# Altium PCB HK0J2071758B02-AM-FPC-A1.PcbDoc (part 2 of 2)
Units mm, origin at the board's own origin, x right, y up, seen from the top; angles counter-clockwise.
Board outline 42.12 x 32.69 mm, 10 copper layers (TopLayer, MidLayer1, MidLayer2, MidLayer3, MidLayer4, MidLayer5, MidLayer6, MidLayer7, MidLayer8, BottomLayer); 37 components, 50 nets, 198 pads, 150 vias.
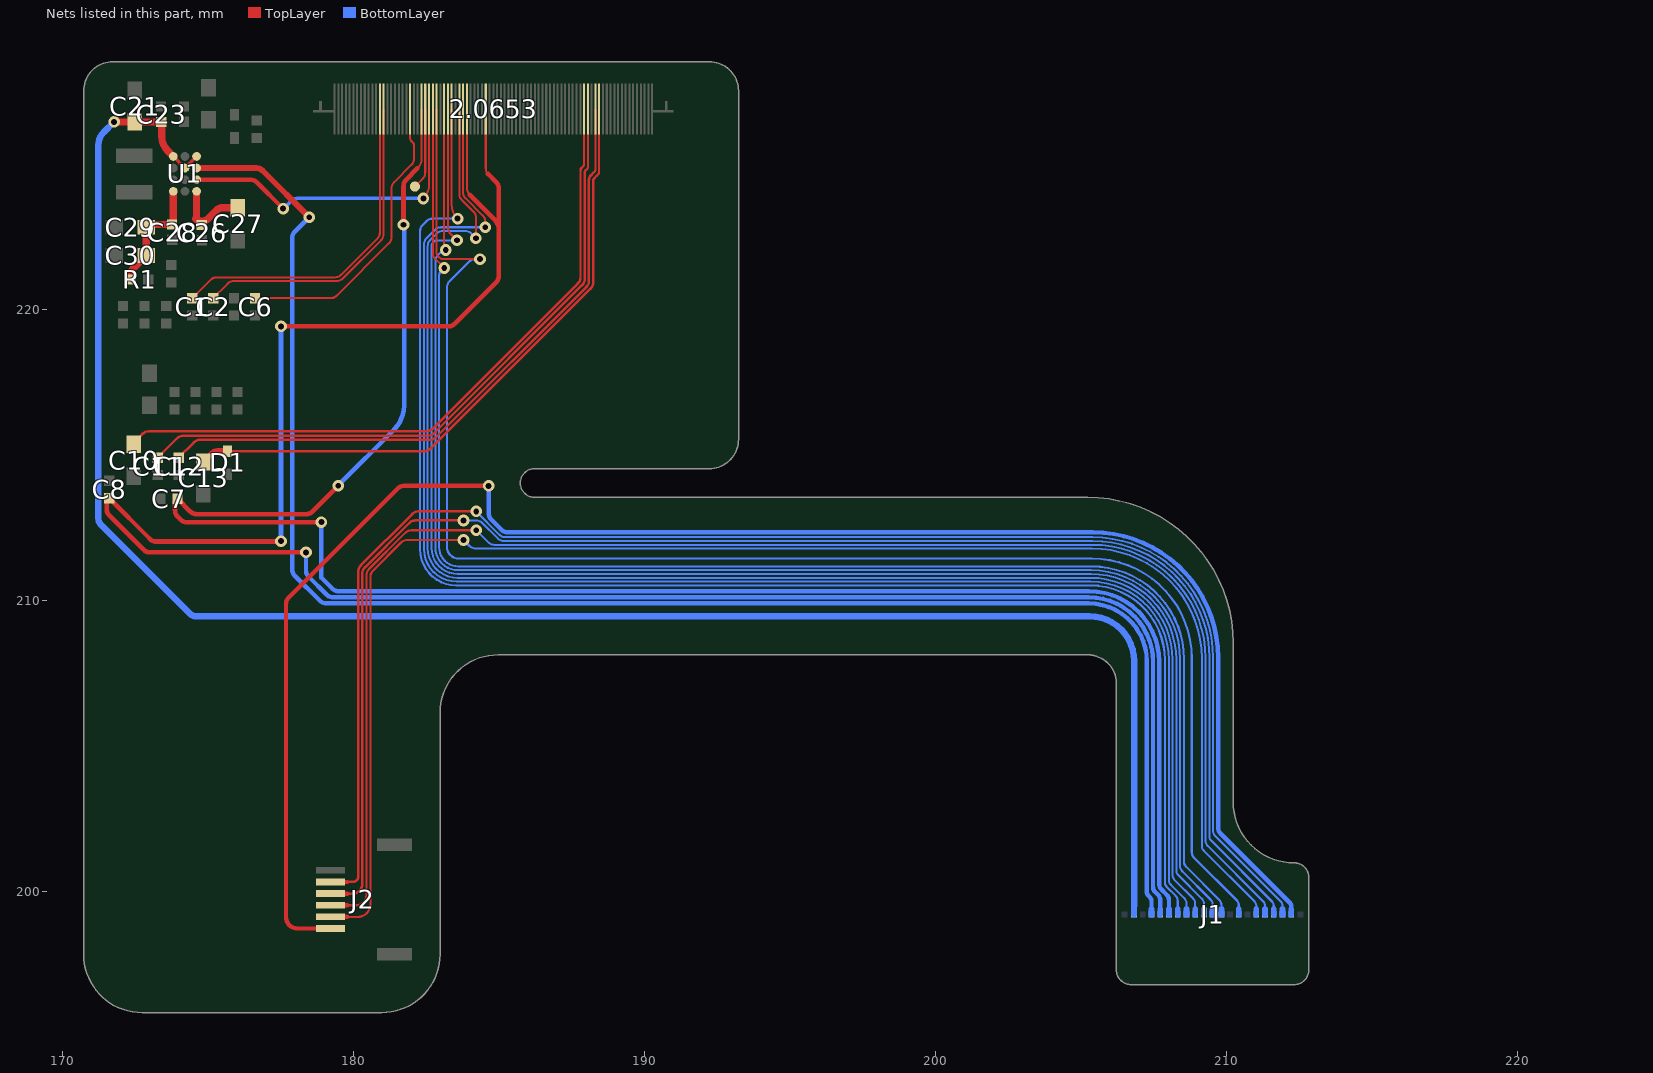
[diagram p2: the nets of this part, all layers, seen from the top]

## Via types
v1: diameter 0.4, hole 0.2, TopLayer to BottomLayer, 150 vias

## Nets (pads, with @x,y where several pads share a name; then routed paths per layer and width w, separated by ;. In a path a pad name is that pad's centre, name@x,y a point inside that pad or via, vN(x,y) a via of type N, cw(c..) or ccw(c..) an arc to the next point about the centre after c; other vN are vias at no path point) (continued)
NetC26_2: C26.2 C27.2 U1.D3 | length 2.7
  TopLayer w0.25: U1.D3@174.606,224.058 174.606,223.083 174.574,223.115 ccw(c174.786,223.327) 174.998,223.115 175.291,223.408 cw(c175.503,223.196) 175.503,223.496 C27.2@176.025,223.496
PVDD: C28.2 C29.1 C30.1 R1.2 U1.D1 | length 4.1
  TopLayer w0.25: R1.2@172.344,221.022 172.344,221.201 cw(c172.644,221.201) 172.432,221.413 C30.1@172.873,221.854 C29.1@172.873,222.821 172.97,222.918 C28.2@173.766,222.918 173.806,222.958 U1.D1@173.806,224.058
RESET: 2.0653.28 J1.8 | length 54.3
  TopLayer w0.07: 2.0653.28@182.857,226.886 182.857,221.934 ccw(c182.984,221.934) 182.894,221.844 182.947,221.791 ccw(c183.1,221.945) 183.1,221.728 v1(184.347,221.728)
  BottomLayer w0.075: v1@184.345,221.727 184.181,221.727 ccw(c184.181,221.447) 183.983,221.645 183.302,220.964 ccw(c183.514,220.752) 183.214,220.752 183.214,211.83 ccw(c183.61,211.83) 183.61,211.435 205.384,211.435 cw(c205.384,207.999) 208.82,207.999 208.82,201.329 ccw(c209.07,201.329) 208.893,201.153 210.37,199.676 cw(c210.211,199.517) 210.436,199.517 210.436,199.386
  BottomLayer w0.2: J1.8@210.436,199.193 210.436,199.386
SCL: 2.0653.32 J1.15 | length 53.1
  TopLayer w0.07: 2.0653.32@183.377,226.886 183.377,223.595 ccw(c184.03,223.595) 183.568,223.133 v1(183.58,223.121) ; v1@183.461,223.14 v1@183.58,223.021
  BottomLayer w0.075: v1(183.58,223.121) 182.721,223.121 ccw(c182.721,222.821) 182.509,223.033 182.377,222.901 ccw(c182.589,222.689) 182.289,222.689 182.289,211.752 ccw(c183.531,211.752) 183.531,210.51 205.339,210.51 cw(c205.339,207.953) 207.895,207.953 207.895,200.309 ccw(c208.145,200.309) 207.968,200.133 208.262,199.838 cw(c208.086,199.662) 208.336,199.662 208.336,199.386
  BottomLayer w0.2: J1.15@208.336,199.193 208.336,199.386
SIO0: 2.0653.30 J1.11 | length 52.2
  TopLayer w0.07: v1@183.117,222.071 2.0653.30@183.117,226.886
  BottomLayer w0.07: v1@183.118,222.077 182.9,221.859 ccw(c183.112,221.647) 182.812,221.647 182.812,211.817 ccw(c183.597,211.817) 183.597,211.032 205.352,211.032 cw(c205.352,207.967) 208.417,207.967 208.417,200.861 ccw(c208.667,200.861) 208.491,200.684 209.462,199.712 cw(c209.286,199.536) 209.536,199.536 209.536,199.386
  BottomLayer w0.2: J1.11@209.536,199.193 209.536,199.386
  other v1: 183.171,222.041
SIO1: 2.0653.31 J1.12 | length 52.9
  TopLayer w0.07: 2.0653.31@183.247,226.886 183.247,222.809 ccw(c183.547,222.809) 183.335,222.597 v1(183.557,222.374)
  BottomLayer w0.07: v1(183.557,222.374) 182.853,222.374 ccw(c182.853,222.269) 182.778,222.343 182.735,222.3 ccw(c182.862,222.173) 182.682,222.173 182.682,211.795 ccw(c183.575,211.795) 183.575,210.902 205.347,210.902 cw(c205.347,207.962) 208.287,207.962 208.287,200.722 ccw(c208.537,200.722) 208.361,200.545 209.162,199.743 cw(c208.986,199.566) 209.236,199.566 209.236,199.386
  BottomLayer w0.2: J1.12@209.236,199.193 209.236,199.386
SIO2: 2.0653.34 J1.13 | length 53.9
  TopLayer w0.07: 2.0653.34@183.637,226.886 183.637,223.972 ccw(c183.937,223.972) 183.725,223.76 184.121,223.364 cw(c183.909,223.151) 184.209,223.151 v1(184.209,222.447)
  BottomLayer w0.07: v1(184.209,222.447) 184.052,222.604 ccw(c183.839,222.392) 183.839,222.692 183.067,222.692 ccw(c183.067,222.392) 182.855,222.604 182.64,222.389 ccw(c182.852,222.177) 182.552,222.177 182.552,211.794 ccw(c183.574,211.794) 183.574,210.772 205.343,210.772 cw(c205.343,207.957) 208.157,207.957 208.157,200.554 ccw(c208.407,200.554) 208.231,200.377 208.862,199.745 cw(c208.686,199.569) 208.936,199.569 208.936,199.386
  BottomLayer w0.2: J1.13@208.936,199.193 208.936,199.386
SIO3: 2.0653.35 J1.14 | length 54
  TopLayer w0.07: 2.0653.35@183.767,226.886 183.767,224.026 ccw(c184.067,224.026) 183.855,223.814 184.444,223.225 cw(c184.232,223.013) 184.532,223.013 v1(184.532,222.822)
  BottomLayer w0.07: v1(184.532,222.822) 183.014,222.822 ccw(c183.014,222.522) 182.802,222.734 182.51,222.443 ccw(c182.722,222.231) 182.422,222.231 182.422,211.765 ccw(c183.545,211.765) 183.545,210.642 205.34,210.642 cw(c205.34,207.955) 208.027,207.955 208.027,200.396 ccw(c208.277,200.396) 208.101,200.219 208.562,199.758 cw(c208.386,199.581) 208.636,199.581 208.636,199.386
  BottomLayer w0.2: J1.14@208.636,199.193 208.636,199.386
SWIRE: 2.0653.26 U1.C3 | length 11.5
  TopLayer w0.07: v1(182.402,223.811) ccw(c181.93,224.283) 182.597,224.283 2.0653.26@182.597,226.886
  TopLayer w0.15: U1.C3@174.606,224.458 176.461,224.458 cw(c176.461,224.158) 176.673,224.37 v1(177.579,223.464)
  BottomLayer w0.12: v1@177.583,223.446 177.861,223.723 cw(c178.073,223.511) 178.073,223.811 v1(182.402,223.811)
TE: 2.0653.27 J1.10 | length 52.3
  TopLayer w0.07: 2.0653.27@182.727,226.886 182.727,221.929 ccw(c182.977,221.929) 182.8,221.752 v1@183.111,221.441
  BottomLayer w0.075: v1@183.086,221.392 183.003,221.309 ccw(c183.144,221.168) 182.944,221.168 182.944,211.822 ccw(c183.601,211.822) 183.601,211.165 205.361,211.165 cw(c205.361,207.976) 208.55,207.976 208.55,201.017 ccw(c208.8,201.017) 208.623,200.84 209.765,199.698 cw(c209.594,199.527) 209.836,199.527 209.836,199.386
  BottomLayer w0.2: J1.10@209.836,199.193 209.836,199.386
  other v1: 183.119,221.423
TE1: 2.0653.25 pad.3 | length 2.8
  TopLayer w0.07: pad.3@182.11,224.222 182.38,224.493 ; 182.381,224.494 ccw(c182.172,224.702) 182.467,224.702 2.0653.25@182.467,226.886
TP-INT: J1.3 J2.2 | length 54.4
  TopLayer w0.085: 179.787,200.316 179.98,200.316 ccw(c179.98,200.496) 180.16,200.496 180.16,210.977 cw(c180.46,210.977) 180.248,211.189 182.025,212.967 cw(c182.237,212.755) 182.237,213.055 v1(184.219,213.055)
  TopLayer w0.15: J2.2@179.211,200.316 179.787,200.316
  BottomLayer w0.07: v1(184.219,213.055) 184.219,213.051 185.014,212.255 ccw(c185.226,212.467) 185.226,212.167 205.412,212.167 cw(c205.412,208.026) 209.552,208.026 209.552,202.072 ccw(c209.802,202.072) 209.626,201.895 211.877,199.644 cw(c211.736,199.502) 211.936,199.502 211.936,199.386
  BottomLayer w0.2: J1.3@211.936,199.193 211.936,199.386
TP-RST: J1.6 J2.5 | length 53.9
  TopLayer w0.075: 179.787,199.116 180.15,199.116 ccw(c180.15,199.546) 180.58,199.546 180.58,210.803 cw(c180.88,210.803) 180.668,211.015 181.635,211.982 cw(c181.847,211.77) 181.847,212.07 v1(183.783,212.07)
  TopLayer w0.15: J2.5@179.211,199.116 179.787,199.116
  BottomLayer w0.07: v1(183.783,212.07) 183.988,211.865 ccw(c184.2,212.077) 184.2,211.777 205.39,211.777 cw(c205.39,208.004) 209.162,208.004 209.162,201.562 ccw(c209.412,201.562) 209.236,201.385 210.977,199.644 cw(c210.836,199.502) 211.036,199.502 211.036,199.386
  BottomLayer w0.2: J1.6@211.036,199.193 211.036,199.386
TP-SCL: J1.5 J2.4 | length 54
  TopLayer w0.075: 179.787,199.516 180.099,199.516 ccw(c180.099,199.861) 180.445,199.861 180.445,210.859 cw(c180.745,210.859) 180.533,211.071 181.777,212.316 cw(c181.989,212.103) 181.989,212.403 v1(184.219,212.403)
  TopLayer w0.15: J2.4@179.211,199.516 179.787,199.516
  BottomLayer w0.07: v1(184.219,212.403) 184.627,211.995 ccw(c184.839,212.207) 184.839,211.907 205.396,211.907 cw(c205.396,208.01) 209.292,208.01 209.292,201.732 ccw(c209.542,201.732) 209.366,201.555 211.277,199.644 cw(c211.136,199.502) 211.336,199.502 211.336,199.386
  BottomLayer w0.2: J1.5@211.336,199.193 211.336,199.386
TP-SDA: J1.4 J2.3 | length 54.2
  TopLayer w0.085: 179.787,199.916 179.967,199.916 ccw(c179.967,200.253) 180.305,200.253 180.305,210.917 cw(c180.605,210.917) 180.393,211.129 181.918,212.654 cw(c182.13,212.442) 182.13,212.742 v1(183.783,212.742)
  TopLayer w0.15: J2.3@179.211,199.916 179.787,199.916
  BottomLayer w0.07: v1(183.783,212.742) 184.219,212.742 cw(c184.219,212.442) 184.431,212.654 184.96,212.125 ccw(c185.173,212.337) 185.173,212.037 205.409,212.037 cw(c205.409,208.023) 209.422,208.023 209.422,201.902 ccw(c209.672,201.902) 209.496,201.725 211.577,199.644 cw(c211.436,199.502) 211.636,199.502 211.636,199.386
  BottomLayer w0.2: J1.4@211.636,199.193 211.636,199.386
TP-VDD: J1.2 J2.6 | length 59.9
  TopLayer w0.15: J2.6@179.211,198.716 178.074,198.716 cw(c178.074,199.11) 177.68,199.11 177.68,209.876 cw(c177.98,209.876) 177.767,210.088 181.523,213.843 cw(c181.735,213.631) 181.735,213.931 v1(184.646,213.931)
  BottomLayer w0.15: v1(184.646,213.931) 184.646,212.988 ccw(c184.946,212.988) 184.734,212.776 185.085,212.425 ccw(c185.297,212.637) 185.297,212.337 205.417,212.337 cw(c205.417,208.032) 209.722,208.032 209.722,202.168 ccw(c209.972,202.168) 209.796,201.991 212.187,199.6 cw(c212.07,199.483) 212.236,199.483 212.236,199.386
  BottomLayer w0.2: J1.2@212.236,199.193 212.236,199.386
VBAT: C21.1 C23.1 J1.20 U1.A1 U1.A3 U1.B2 | length 64.6
  TopLayer w0.12: U1.A1@173.806,225.258 U1.B2@174.206,224.858 U1.A3@174.606,225.258
  TopLayer w0.25: v1(171.77,226.444) C23.1@173.391,226.444 ; C23.1@173.404,226.478 173.404,225.957 ccw(c174.124,225.957) 173.615,225.448 U1.A1@173.806,225.258
  BottomLayer w0.2: J1.20@206.836,199.193 206.836,199.49
  BottomLayer w0.22: 171.407,226.081 ccw(c171.838,225.651) 171.229,225.651 171.229,212.812 ccw(c171.529,212.812) 171.317,212.599 174.378,209.538 ccw(c174.591,209.75) 174.591,209.45 205.299,209.45 cw(c205.299,207.914) 206.836,207.914 206.836,199.49 ; 171.408,226.081 v1(171.77,226.444)
VCI: 2.0653.24 C7.1 J1.16 | length 67
  TopLayer w0.07: 182.197,224.845 ccw(c181.861,225.181) 182.337,225.181 2.0653.24@182.337,226.886
  TopLayer w0.16: v1@178.895,212.683 174.263,212.683 cw(c174.263,212.961) 174.067,212.764 173.951,212.879 cw(c174.163,213.092) 173.863,213.092 173.863,213.395 C7.1@173.954,213.486 174.392,213.049 ccw(c174.604,213.261) 174.604,212.961 178.377,212.961 ccw(c178.377,213.261) 178.589,213.049 v1(179.476,213.935) ; v1(181.718,222.906) 181.718,224.234 cw(c182.035,224.234) 181.811,224.458 182.197,224.845
  BottomLayer w0.15: v1(178.897,212.685) 178.897,210.776 179.274,210.399 ccw(c179.486,210.611) 179.486,210.311 205.283,210.311 cw(c205.283,207.897) 207.696,207.897 207.696,200.238 ccw(c207.946,200.238) 207.769,200.061 207.962,199.868 cw(c207.786,199.692) 208.036,199.692 208.036,199.386
  BottomLayer w0.16: v1@179.483,213.952 181.393,215.862 ccw(c180.556,216.699) 181.739,216.699 v1@181.739,223.016
  BottomLayer w0.2: J1.16@208.036,199.193 208.036,199.386
VCI_EN: J1.18 U1.B3 | length 56.7
  TopLayer w0.2: U1.B3@174.606,224.858 176.661,224.858 cw(c176.661,224.558) 176.873,224.77 v1(178.477,223.166)
  BottomLayer w0.15: v1(178.477,223.166) 177.983,222.671 ccw(c178.195,222.459) 177.895,222.459 177.895,211.058 ccw(c178.195,211.058) 177.983,210.846 178.85,209.979 ccw(c179.062,210.191) 179.062,209.891 205.276,209.891 cw(c205.276,207.891) 207.276,207.891 207.276,199.951 ccw(c207.41,199.951) 207.316,199.856 207.371,199.801 cw(c207.216,199.645) 207.436,199.645 207.436,199.386
  BottomLayer w0.2: J1.18@207.436,199.193 207.436,199.386
VDDI: 2.0653.36 2.0653.41 C8.1 J1.17 | length 80.8
  TopLayer w0.07: 2.0653.36@183.897,226.886 183.897,224.172 ccw(c184.234,224.172) 183.995,223.933 ; 2.0653.41@184.547,226.886 184.547,224.844 ccw(c184.818,224.844) 184.626,224.653
  TopLayer w0.16: v1@177.508,212.018 173.218,212.018 cw(c173.218,212.318) 173.005,212.106 C8.1@171.603,213.508 171.513,213.418 171.513,213.136 ccw(c171.813,213.136) 171.601,212.924 172.793,211.732 ccw(c173.005,211.944) 173.005,211.644 v1@178.374,211.644 ; v1(177.508,219.416) 183.265,219.416 ccw(c183.265,219.716) 183.477,219.503 184.907,220.934 ccw(c184.695,221.146) 184.995,221.146 184.995,222.732 ; 183.995,223.933 184.853,223.076 cw(c184.509,222.732) 184.995,222.732 ; 184.626,224.652 184.907,224.371 cw(c184.695,224.159) 184.995,224.159 184.995,222.732
  BottomLayer w0.15: v1(178.366,211.646) 178.366,211.028 ccw(c178.666,211.028) 178.454,210.816 179.082,210.189 ccw(c179.294,210.401) 179.294,210.101 205.276,210.101 cw(c205.276,207.891) 207.486,207.891 207.486,200.148 ccw(c207.735,200.148) 207.559,199.972 207.662,199.868 cw(c207.486,199.692) 207.736,199.692 207.736,199.386
  BottomLayer w0.16: v1(177.508,212.032) v1(177.508,219.416)
  BottomLayer w0.2: J1.17@207.736,199.193 207.736,199.386
VGH: 2.0653.67 C10.1 | length 23.5
  TopLayer w0.07: 187.889,224.915 187.911,224.937 ccw(c187.874,224.974) 187.927,224.974 2.0653.67@187.927,226.886
  TopLayer w0.085: C10.1@172.478,215.449 172.746,215.717 cw(c172.958,215.505) 172.958,215.805 182.504,215.805 ccw(c182.504,216.105) 182.716,215.892 187.716,220.892 ccw(c187.504,221.105) 187.804,221.105 187.804,224.768 cw(c187.947,224.768) 187.846,224.869 187.905,224.928
VGHO: 2.0653.68 C11.1 | length 23.1
  TopLayer w0.07: 188.01,224.805 188.038,224.832 ccw(c187.991,224.879) 188.057,224.879 2.0653.68@188.057,226.886
  TopLayer w0.085: C11.1@173.271,214.901 173.941,215.572 cw(c174.153,215.36) 174.153,215.66 182.564,215.66 ccw(c182.564,215.96) 182.776,215.747 187.861,220.832 ccw(c187.649,221.045) 187.949,221.045 187.949,224.708 cw(c188.036,224.708) 187.975,224.769 188.01,224.805
VGL: 2.0653.71 C13.1 D1.1 | length 22
  TopLayer w0.07: 188.367,224.598 188.414,224.645 ccw(c188.335,224.724) 188.447,224.724 2.0653.71@188.447,226.886
  TopLayer w0.085: D1.1@175.672,215.126 182.441,215.126 ccw(c182.441,215.426) 182.653,215.214 188.151,220.712 ccw(c187.939,220.924) 188.239,220.924 188.239,224.395 cw(c188.421,224.395) 188.292,224.523 188.367,224.598
  TopLayer w0.2: C13.1@174.834,214.753 175.12,215.038 cw(c175.332,214.826) 175.332,215.126 D1.1@175.672,215.126
VGLO: 2.0653.70 C12.1 | length 22.6
  TopLayer w0.07: 188.251,224.7 188.289,224.739 ccw(c188.223,224.805) 188.317,224.805 2.0653.70@188.317,226.886
  TopLayer w0.085: C12.1@173.991,214.901 174.516,215.427 cw(c174.728,215.215) 174.728,215.515 182.624,215.515 ccw(c182.624,215.815) 182.836,215.602 188.006,220.772 ccw(c187.794,220.984) 188.094,220.984 188.094,224.452 cw(c188.316,224.452) 188.159,224.608 188.251,224.7
VREF: 2.0653.21 C6.1 | length 10.3
  TopLayer w0.07: C6.1@176.616,220.384 179.212,220.384 ccw(c179.212,220.684) 179.424,220.472 181.219,222.267 ccw(c181.007,222.479) 181.307,222.479 181.307,224.158 cw(c181.607,224.158) 181.394,224.37 181.992,224.967 ccw(c181.779,225.179) 182.079,225.179 182.079,225.648 ccw(c181.969,225.648) 182.047,225.725 182.002,225.771 cw(c182.134,225.904) 181.947,225.904 2.0653.21@181.947,226.886
VREFN: 2.0653.14 C2.1 | length 11.2
  TopLayer w0.07: C2.1@175.131,220.342 175.673,220.884 cw(c175.886,220.672) 175.886,220.972 179.418,220.972 ccw(c179.418,221.272) 179.63,221.06 180.949,222.378 ccw(c180.737,222.59) 181.037,222.59 2.0653.14@181.037,226.886
VREFP: 2.0653.13 C1.1 | length 11.7
  TopLayer w0.07: C1.1@174.456,220.384 175.086,221.014 cw(c175.298,220.802) 175.298,221.102 179.364,221.102 ccw(c179.364,221.402) 179.576,221.19 180.819,222.432 ccw(c180.607,222.644) 180.907,222.644 2.0653.13@180.907,226.886
pads on no net: 2.0653.1 2.0653.2 2.0653.3 2.0653.8 2.0653.15 2.0653.17 2.0653.20 2.0653.22 2.0653.23 2.0653.29 2.0653.40 2.0653.66 2.0653.69 2.0653.78 2.0653.83 2.0653.84 2.0653.85

## Polygon pours and split planes (outlines as drawn)
GND on TopLayer "1" (solid, remove dead copper, pour order 12): 206.451,202.986 213.366,202.986 213.366,196.77 204.777,196.77
GND on TopLayer " " (hatched 45Degree grid 0.35 track 0.1, remove dead copper, pour order 30): 164.794,226.972 170.481,232.659 cw(c172.277,230.863) 172.277,233.403 199.434,233.403 217.193,215.643 cw(c215.397,213.847) 217.937,213.847 217.937,195.607 172.237,195.607 ccw(c172.237,193.067) 170.441,194.863 168.463,192.885
GND on TopLayer " " (solid, remove dead copper, pour order 34): 158.603,226.326 162.811,230.534 cw(c164.607,228.738) 164.607,231.278 226.783,231.278 226.783,195.611 cw(c224.243,195.611) 226.039,193.815 219.528,187.305 cw(c217.732,189.101) 217.732,186.561 153.88,186.561
GND on BottomLayer " " (hatched 45Degree grid 0.35 track 0.1, remove dead copper, pour order 28): 163.76,223.892 169.767,229.899 cw(c171.563,228.103) 171.563,230.643 213.621,230.643 217.12,227.144 cw(c215.324,225.348) 217.864,225.348 217.864,199.637 202.251,199.637 cw(c202.251,199.842) 202.106,199.697 191.281,199.697 ccw(c191.281,197.157) 189.485,198.953 183.984,193.453 cw(c182.188,195.249) 182.188,192.709 170.759,192.709
GND on BottomLayer " " (solid, remove dead copper, pour order 36): 185.726,214.005 185.726,193.411 cw(c185.564,193.411) 185.678,193.296 185.102,193.873 ccw(c183.306,192.077) 183.306,194.617 159.878,194.617 165.94,200.678 ccw(c164.144,202.474) 166.684,202.474 166.684,233.825 201.284,233.825 ccw(c201.284,236.365) 203.08,234.569 201.658,233.147 ccw(c203.454,231.35) 200.914,231.35 200.914,214.932

## Keep-outs
KeepOutLayer:
  lines w0.013: 170.73,197.83 ccw(c172.73,197.83) 172.73,195.83 ; 170.73,197.83 ccw(c172.73,197.83) 172.73,195.83 ; 170.73,197.83 ccw(c172.73,197.83) 172.73,195.83 ; 170.73,197.83 ccw(c172.73,197.83) 172.73,195.83 ; 170.73,197.83 170.73,227.509 ; 170.73,197.83 170.73,227.509 ; 170.73,197.83 170.73,227.509 ; 170.73,197.83 170.73,227.509 ; 170.73,227.509 cw(c171.73,227.509) 171.73,228.509 ; 170.73,227.509 cw(c171.73,227.509) 171.73,228.509 ; 170.73,227.509 cw(c171.73,227.509) 171.73,228.509 ; 170.73,227.509 cw(c171.73,227.509) 171.73,228.509 ; 171.73,228.509 192.23,228.509 ; 171.73,228.509 192.23,228.509 ; 171.73,228.509 192.23,228.509 ; 171.73,228.509 192.23,228.509 ; 172.73,195.83 180.97,195.83 ; 172.73,195.83 180.97,195.83 ; 172.73,195.83 180.97,195.83 ; 172.73,195.83 180.97,195.83 ; 180.97,195.83 ccw(c180.97,197.83) 182.97,197.83 ; 180.97,195.83 ccw(c180.97,197.83) 182.97,197.83 ; 180.97,195.83 ccw(c180.97,197.83) 182.97,197.83 ; 180.97,195.83 ccw(c180.97,197.83) 182.97,197.83 ; 182.97,197.83 182.97,206.13 ; 182.97,197.83 182.97,206.13 ; 182.97,197.83 182.97,206.13 ; 182.97,197.83 182.97,206.13 ; 182.97,206.13 cw(c184.97,206.13) 184.97,208.13 ; 182.97,206.13 cw(c184.97,206.13) 184.97,208.13 ; 182.97,206.13 cw(c184.97,206.13) 184.97,208.13 ; 182.97,206.13 cw(c184.97,206.13) 184.97,208.13 ; 184.97,208.13 205.235,208.13 ; 184.97,208.13 205.235,208.13 ; 184.97,208.13 205.235,208.13 ; 184.97,208.13 205.235,208.13 ; 186.23,213.53 cw(c186.23,214.03) 186.23,214.53 ; 186.23,213.53 cw(c186.23,214.03) 186.23,214.53 ; 186.23,213.53 cw(c186.23,214.03) 186.23,214.53 ; 186.23,213.53 cw(c186.23,214.03) 186.23,214.53 ; 186.23,213.53 205.235,213.53 ; 186.23,213.53 205.235,213.53 ; 186.23,213.53 205.235,213.53 ; 186.23,213.53 205.235,213.53 ; 186.23,214.53 192.23,214.53 ; 186.23,214.53 192.23,214.53 ; 186.23,214.53 192.23,214.53 ; 186.23,214.53 192.23,214.53 ; 192.23,214.53 ccw(c192.23,215.53) 193.23,215.53 ; 192.23,214.53 ccw(c192.23,215.53) 193.23,215.53 ; 192.23,214.53 ccw(c192.23,215.53) 193.23,215.53 ; 192.23,214.53 ccw(c192.23,215.53) 193.23,215.53 ; 192.23,228.509 cw(c192.23,227.509) 193.23,227.509 ; 192.23,228.509 cw(c192.23,227.509) 193.23,227.509 ; 192.23,228.509 cw(c192.23,227.509) 193.23,227.509 ; 192.23,228.509 cw(c192.23,227.509) 193.23,227.509 ; 193.23,215.53 193.23,227.509 ; 193.23,215.53 193.23,227.509 ; 193.23,215.53 193.23,227.509 ; 193.23,215.53 193.23,227.509 ; 205.235,208.13 205.236,208.13 ; 205.235,208.13 205.236,208.13 ; 205.235,208.13 205.236,208.13 ; 205.235,208.13 205.236,208.13 ; 205.235,213.53 cw(c205.235,208.53) 210.235,208.53 ; 205.235,213.53 cw(c205.235,208.53) 210.235,208.53 ; 205.235,213.53 cw(c205.235,208.53) 210.235,208.53 ; 205.235,213.53 cw(c205.235,208.53) 210.235,208.53 ; 205.236,208.13 cw(c205.23,207.07) 205.283,208.129 ; 205.236,208.13 cw(c205.23,207.07) 205.283,208.129 ; 205.236,208.13 cw(c205.23,207.07) 205.283,208.129 ; 205.236,208.13 cw(c205.23,207.07) 205.283,208.129 ; 205.283,208.129 cw(c205.231,207.082) 205.313,208.127 ; 205.283,208.129 cw(c205.231,207.082) 205.313,208.127 ; 205.283,208.129 cw(c205.231,207.082) 205.313,208.127 ; 205.283,208.129 cw(c205.231,207.082) 205.313,208.127 ; 205.313,208.127 cw(c205.232,207.092) 205.337,208.125 ; 205.313,208.127 cw(c205.232,207.092) 205.337,208.125 ; 205.313,208.127 cw(c205.232,207.092) 205.337,208.125 ; 205.313,208.127 cw(c205.232,207.092) 205.337,208.125 ; 205.337,208.125 cw(c205.233,207.103) 205.358,208.123 ; 205.337,208.125 cw(c205.233,207.103) 205.358,208.123 ; 205.337,208.125 cw(c205.233,207.103) 205.358,208.123 ; 205.337,208.125 cw(c205.233,207.103) 205.358,208.123 ; 205.358,208.123 cw(c205.234,207.113) 205.377,208.12 ; 205.358,208.123 cw(c205.234,207.113) 205.377,208.12 ; 205.358,208.123 cw(c205.234,207.113) 205.377,208.12 ; 205.358,208.123 cw(c205.234,207.113) 205.377,208.12 ; 205.377,208.12 cw(c205.235,207.123) 205.395,208.117 ; 205.377,208.12 cw(c205.235,207.123) 205.395,208.117 ; 205.377,208.12 cw(c205.235,207.123) 205.395,208.117 ; 205.377,208.12 cw(c205.235,207.123) 205.395,208.117 ; 205.395,208.117 205.411,208.115 ; 205.395,208.117 205.411,208.115 ; 205.395,208.117 205.411,208.115 ; 205.395,208.117 205.411,208.115 ; 205.411,208.115 205.426,208.112 ; 205.411,208.115 205.426,208.112 ; 205.411,208.115 205.426,208.112 ; 205.411,208.115 205.426,208.112 ; 205.426,208.112 205.441,208.109 ; 205.426,208.112 205.441,208.109 ; 205.426,208.112 205.441,208.109 ; 205.426,208.112 205.441,208.109 ; 205.441,208.109 205.455,208.106 ; 205.441,208.109 205.455,208.106 ; 205.441,208.109 205.455,208.106 ; 205.441,208.109 205.455,208.106 ; 205.455,208.106 205.468,208.103 ; 205.455,208.106 205.468,208.103 ; 205.455,208.106 205.468,208.103 ; 205.455,208.106 205.468,208.103 ; 205.468,208.103 cw(c205.237,207.14) 205.536,208.084 ; 205.468,208.103 cw(c205.237,207.14) 205.536,208.084 ; 205.468,208.103 cw(c205.237,207.14) 205.536,208.084 ; 205.468,208.103 cw(c205.237,207.14) 205.536,208.084 ; 205.536,208.084 cw(c205.231,207.122) 205.696,208.017 ; 205.536,208.084 cw(c205.231,207.122) 205.696,208.017 ; 205.536,208.084 cw(c205.231,207.122) 205.696,208.017 ; 205.536,208.084 cw(c205.231,207.122) 205.696,208.017 ; 205.696,208.017 cw(c205.239,207.137) 205.757,207.983 ; 205.696,208.017 cw(c205.239,207.137) 205.757,207.983 ; 205.696,208.017 cw(c205.239,207.137) 205.757,207.983 ; 205.696,208.017 cw(c205.239,207.137) 205.757,207.983 ; 205.757,207.983 cw(c205.235,207.13) 206.087,207.653 ; 205.757,207.983 cw(c205.235,207.13) 206.087,207.653 ; 205.757,207.983 cw(c205.235,207.13) 206.087,207.653 ; 205.757,207.983 cw(c205.235,207.13) 206.087,207.653 ; 206.087,207.653 cw(c205.241,207.134) 206.122,207.592 ; 206.087,207.653 cw(c205.241,207.134) 206.122,207.592 ; 206.087,207.653 cw(c205.241,207.134) 206.122,207.592 ; 206.087,207.653 cw(c205.241,207.134) 206.122,207.592 ; 206.122,207.592 cw(c205.227,207.127) 206.188,207.431 ; 206.122,207.592 cw(c205.227,207.127) 206.188,207.431 ; 206.122,207.592 cw(c205.227,207.127) 206.188,207.431 ; 206.122,207.592 cw(c205.227,207.127) 206.188,207.431 ; 206.188,207.431 cw(c205.244,207.133) 206.207,207.364 ; 206.188,207.431 cw(c205.244,207.133) 206.207,207.364 ; 206.188,207.431 cw(c205.244,207.133) 206.207,207.364 ; 206.188,207.431 cw(c205.244,207.133) 206.207,207.364 ; 206.208,207.362 206.207,207.364 ; 206.208,207.362 206.211,207.349 ; 206.208,207.362 206.207,207.364 ; 206.208,207.362 206.211,207.349 ; 206.208,207.362 206.211,207.349 ; 206.208,207.362 206.207,207.364 ; 206.208,207.362 206.211,207.349 ; 206.208,207.362 206.207,207.364 ; 206.211,207.349 206.214,207.335 ; 206.211,207.349 206.214,207.335 ; 206.211,207.349 206.214,207.335 ; 206.211,207.349 206.214,207.335 ; 206.214,207.335 206.216,207.32 ; 206.214,207.335 206.216,207.32 ; 206.214,207.335 206.216,207.32 ; 206.214,207.335 206.216,207.32 ; 206.216,207.32 206.219,207.305 ; 206.216,207.32 206.219,207.305 ; 206.216,207.32 206.219,207.305 ; 206.216,207.32 206.219,207.305 ; 206.219,207.305 206.222,207.289 ; 206.219,207.305 206.222,207.289 ; 206.219,207.305 206.222,207.289 ; 206.219,207.305 206.222,207.289 ; 206.222,207.289 206.225,207.272 ; 206.222,207.289 206.225,207.272 ; 206.222,207.289 206.225,207.272 ; 206.222,207.289 206.225,207.272 ; 206.225,207.272 cw(c205.217,207.129) 206.227,207.253 ; 206.225,207.272 cw(c205.217,207.129) 206.227,207.253 ; 206.225,207.272 cw(c205.217,207.129) 206.227,207.253 ; 206.225,207.272 cw(c205.217,207.129) 206.227,207.253 ; 206.227,207.253 cw(c205.206,207.128) 206.229,207.232 ; 206.227,207.253 cw(c205.206,207.128) 206.229,207.232 ; 206.227,207.253 cw(c205.206,207.128) 206.229,207.232 ; 206.227,207.253 cw(c205.206,207.128) 206.229,207.232 ; 206.229,207.232 cw(c205.196,207.127) 206.232,207.207 ; 206.229,207.232 cw(c205.196,207.127) 206.232,207.207 ; 206.229,207.232 cw(c205.196,207.127) 206.232,207.207 ; 206.229,207.232 cw(c205.196,207.127) 206.232,207.207 ; 206.232,207.207 cw(c205.186,207.126) 206.234,207.177 ; 206.232,207.207 cw(c205.186,207.126) 206.234,207.177 ; 206.232,207.207 cw(c205.186,207.126) 206.234,207.177 ; 206.232,207.207 cw(c205.186,207.126) 206.234,207.177 ; 206.234,207.177 cw(c205.175,207.126) 206.235,207.13 ; 206.234,207.177 cw(c205.175,207.126) 206.235,207.13 ; 206.234,207.177 cw(c205.175,207.126) 206.235,207.13 ; 206.234,207.177 cw(c205.175,207.126) 206.235,207.13 ; 206.235,197.292 ccw(c206.735,197.292) 206.735,196.792 ; 206.235,197.292 ccw(c206.735,197.292) 206.735,196.792 ; 206.235,197.292 ccw(c206.735,197.292) 206.735,196.792 ; 206.235,197.292 ccw(c206.735,197.292) 206.735,196.792 ; 206.235,197.292 206.235,199.792 ; 206.235,197.292 206.235,199.792 ; 206.235,197.292 206.235,199.792 ; 206.235,197.292 206.235,199.792 ; 206.235,199.792 206.235,207.13 ; 206.235,199.792 206.235,207.13 ; 206.235,199.792 206.235,207.13 ; 206.235,199.792 206.235,207.13 ; 206.735,196.792 212.335,196.792 ; 206.735,196.792 212.335,196.792 ; 206.735,196.792 212.335,196.792 ; 206.735,196.792 212.335,196.792 ; 210.235,203.067 ccw(c212.335,203.067) 212.335,200.967 ; 210.235,203.067 ccw(c212.335,203.067) 212.335,200.967 ; 210.235,203.067 ccw(c212.335,203.067) 212.335,200.967 ; 210.235,203.067 ccw(c212.335,203.067) 212.335,200.967 ; 210.235,203.067 210.235,208.53 ; 210.235,203.067 210.235,208.53 ; 210.235,203.067 210.235,208.53 ; 210.235,203.067 210.235,208.53 ; 212.335,196.792 ccw(c212.335,197.292) 212.835,197.292 ; 212.335,196.792 ccw(c212.335,197.292) 212.835,197.292 ; 212.335,196.792 ccw(c212.335,197.292) 212.835,197.292 ; 212.335,196.792 ccw(c212.335,197.292) 212.835,197.292 ; 212.335,200.967 cw(c212.331,200.421) 212.355,200.967 ; 212.335,200.967 cw(c212.331,200.421) 212.355,200.967 ; 212.335,200.967 cw(c212.331,200.421) 212.355,200.967 ; 212.335,200.967 cw(c212.331,200.421) 212.355,200.967 ; 212.355,200.967 cw(c212.331,200.427) 212.368,200.966 ; 212.355,200.967 cw(c212.331,200.427) 212.368,200.966 ; 212.355,200.967 cw(c212.331,200.427) 212.368,200.966 ; 212.355,200.967 cw(c212.331,200.427) 212.368,200.966 ; 212.368,200.966 cw(c212.331,200.432) 212.38,200.965 ; 212.368,200.966 cw(c212.331,200.432) 212.38,200.965 ; 212.368,200.966 cw(c212.331,200.432) 212.38,200.965 ; 212.368,200.966 cw(c212.331,200.432) 212.38,200.965 ; 212.38,200.965 cw(c212.332,200.438) 212.39,200.964 ; 212.38,200.965 cw(c212.332,200.438) 212.39,200.964 ; 212.38,200.965 cw(c212.332,200.438) 212.39,200.964 ; 212.38,200.965 cw(c212.332,200.438) 212.39,200.964 ; 212.39,200.964 212.399,200.963 ; 212.39,200.964 212.399,200.963 ; 212.39,200.964 212.399,200.963 ; 212.39,200.964 212.399,200.963 ; 212.399,200.963 212.407,200.962 ; 212.399,200.963 212.407,200.962 ; 212.399,200.963 212.407,200.962 ; 212.399,200.963 212.407,200.962 ; 212.407,200.962 212.415,200.961 ; 212.407,200.962 212.415,200.961 ; 212.407,200.962 212.415,200.961 ; 212.407,200.962 212.415,200.961 ; 212.415,200.961 212.422,200.959 ; 212.415,200.961 212.422,200.959 ; 212.415,200.961 212.422,200.959 ; 212.415,200.961 212.422,200.959 ; 212.422,200.959 212.429,200.958 ; 212.422,200.959 212.429,200.958 ; 212.422,200.959 212.429,200.958 ; 212.422,200.959 212.429,200.958 ; 212.429,200.958 212.436,200.957 ; 212.429,200.958 212.436,200.957 ; 212.429,200.958 212.436,200.957 ; 212.429,200.958 212.436,200.957 ; 212.436,200.957 212.443,200.955 ; 212.436,200.957 212.443,200.955 ; 212.436,200.957 212.443,200.955 ; 212.436,200.957 212.443,200.955 ; 212.443,200.955 212.449,200.954 ; 212.443,200.955 212.449,200.954 ; 212.443,200.955 212.449,200.954 ; 212.443,200.955 212.449,200.954 ; 212.449,200.954 212.455,200.952 ; 212.449,200.954 212.455,200.952 ; 212.449,200.954 212.455,200.952 ; 212.449,200.954 212.455,200.952 ; 212.455,200.952 212.461,200.951 ; 212.455,200.952 212.461,200.951 ; 212.455,200.952 212.461,200.951 ; 212.455,200.952 212.461,200.951 ; 212.461,200.951 212.466,200.949 ; 212.461,200.951 212.466,200.949 ; 212.461,200.951 212.466,200.949 ; 212.461,200.951 212.466,200.949 ; 212.466,200.949 212.472,200.948 ; 212.466,200.949 212.472,200.948 ; 212.466,200.949 212.472,200.948 ; 212.466,200.949 212.472,200.948 ; 212.472,200.948 212.473,200.948 ; 212.472,200.948 212.473,200.948 ; 212.472,200.948 212.473,200.948 ; 212.472,200.948 212.473,200.948 ; 212.473,200.948 cw(c212.337,200.476) 212.502,200.938 ; 212.473,200.948 cw(c212.337,200.476) 212.502,200.938 ; 212.473,200.948 cw(c212.337,200.476) 212.502,200.938 ; 212.473,200.948 cw(c212.337,200.476) 212.502,200.938 ; 212.502,200.938 cw(c212.332,200.461) 212.623,200.876 ; 212.502,200.938 cw(c212.332,200.461) 212.623,200.876 ; 212.502,200.938 cw(c212.332,200.461) 212.623,200.876 ; 212.502,200.938 cw(c212.332,200.461) 212.623,200.876 ; 212.623,200.876 cw(c212.338,200.47) 212.743,200.755 ; 212.623,200.876 cw(c212.338,200.47) 212.743,200.755 ; 212.623,200.876 cw(c212.338,200.47) 212.743,200.755 ; 212.623,200.876 cw(c212.338,200.47) 212.743,200.755 ; 212.743,200.755 cw(c212.329,200.464) 212.806,200.634 ; 212.743,200.755 cw(c212.329,200.464) 212.806,200.634 ; 212.743,200.755 cw(c212.329,200.464) 212.806,200.634 ; 212.743,200.755 cw(c212.329,200.464) 212.806,200.634 ; 212.806,200.634 cw(c212.344,200.47) 212.815,200.605 ; 212.806,200.634 cw(c212.344,200.47) 212.815,200.605 ; 212.806,200.634 cw(c212.344,200.47) 212.815,200.605 ; 212.806,200.634 cw(c212.344,200.47) 212.815,200.605 ; 212.815,200.605 212.817,200.6 ; 212.815,200.605 212.817,200.6 ; 212.815,200.605 212.817,200.6 ; 212.815,200.605 212.817,200.6 ; 212.817,200.6 212.818,200.594 ; 212.817,200.6 212.818,200.594 ; 212.817,200.6 212.818,200.594 ; 212.817,200.6 212.818,200.594 ; 212.818,200.594 212.82,200.588 ; 212.818,200.594 212.82,200.588 ; 212.818,200.594 212.82,200.588 ; 212.818,200.594 212.82,200.588 ; 212.82,200.588 212.821,200.582 ; 212.82,200.588 212.821,200.582 ; 212.82,200.588 212.821,200.582 ; 212.82,200.588 212.821,200.582 ; 212.821,200.582 212.823,200.575 ; 212.821,200.582 212.823,200.575 ; 212.821,200.582 212.823,200.575 ; 212.821,200.582 212.823,200.575 ; 212.823,200.575 212.824,200.569 ; 212.823,200.575 212.824,200.569 ; 212.823,200.575 212.824,200.569 ; 212.823,200.575 212.824,200.569 ; 212.824,200.569 212.826,200.562 ; 212.824,200.569 212.826,200.562 ; 212.824,200.569 212.826,200.562 ; 212.824,200.569 212.826,200.562 ; 212.826,200.562 212.827,200.555 ; 212.826,200.562 212.827,200.555 ; 212.826,200.562 212.827,200.555 ; 212.826,200.562 212.827,200.555 ; 212.827,200.555 212.828,200.548 ; 212.827,200.555 212.828,200.548 ; 212.827,200.555 212.828,200.548 ; 212.827,200.555 212.828,200.548 ; 212.828,200.548 212.829,200.54 ; 212.828,200.548 212.829,200.54 ; 212.828,200.548 212.829,200.54 ; 212.828,200.548 212.829,200.54 ; 212.829,200.54 212.83,200.531 ; 212.829,200.54 212.83,200.531 ; 212.829,200.54 212.83,200.531 ; 212.829,200.54 212.83,200.531 ; 212.83,200.531 cw(c212.31,200.465) 212.832,200.522 ; 212.83,200.531 cw(c212.31,200.465) 212.832,200.522 ; 212.83,200.531 cw(c212.31,200.465) 212.832,200.522 ; 212.83,200.531 cw(c212.31,200.465) 212.832,200.522 ; 212.832,200.522 cw(c212.305,200.464) 212.833,200.512 ; 212.832,200.522 cw(c212.305,200.464) 212.833,200.512 ; 212.832,200.522 cw(c212.305,200.464) 212.833,200.512 ; 212.832,200.522 cw(c212.305,200.464) 212.833,200.512 ; 212.833,200.5 cw(c212.294,200.463) 212.834,200.486 ; 212.833,200.5 ccw(c212.3,200.464) 212.833,200.512 ; 212.833,200.5 cw(c212.294,200.463) 212.834,200.486 ; 212.833,200.5 ccw(c212.3,200.464) 212.833,200.512 ; 212.833,200.5 ccw(c212.3,200.464) 212.833,200.512 ; 212.833,200.5 cw(c212.294,200.463) 212.834,200.486 ; 212.833,200.5 ccw(c212.3,200.464) 212.833,200.512 ; 212.833,200.5 cw(c212.294,200.463) 212.834,200.486 ; 212.835,197.292 212.835,200.467 ; 212.835,197.292 212.835,200.467 ; 212.835,197.292 212.835,200.467 ; 212.835,197.292 212.835,200.467 ; 212.835,200.467 ccw(c212.289,200.463) 212.834,200.486 ; 212.835,200.467 ccw(c212.289,200.463) 212.834,200.486 ; 212.835,200.467 ccw(c212.289,200.463) 212.834,200.486 ; 212.835,200.467 ccw(c212.289,200.463) 212.834,200.486

## Other copper
TopLayer:
  pour cut-out: 178.031,228.172 191.841,228.172 191.841,225.87 177.823,225.87 177.823,228.172
  pour cut-out: 185.726,214.005 185.726,205.963 188.759,202.93 211.443,202.93 213.423,204.911 213.423,213.754
  pour cut-out: 171.815,225.057 172.75,225.057 172.75,224.19 171.824,224.19
BottomLayer:
  pour cut-out: 178.515,227.276 179.148,227.276 179.148,226.635 178.485,226.635 178.485,227.276
  pour cut-out: 190.487,227.255 191.12,227.255 191.12,226.614 190.457,226.614 190.457,227.255

## Silkscreen, mask and mechanical layers (free items; w line width, h text height)
TopOverlay:
  drawing of 75 lines, arcs and shapes, not listed
  text "HK0J2071758B02-AM-FPC-A1" at 171.41,208.825 h1.6
  text "21" at 206.738,203.327 h1.35
  text "1" at 209.202,203.293 h1.35
BottomOverlay:
  drawing of 1417 lines, arcs and shapes, not listed
  text "6" at 177.387,200.936 h0.5
  text "6" at 177.387,200.936 h0.5
  text "21" at 206.606,199.558 h0.5
  text "21" at 206.606,199.558 h0.5
  text "1" at 212.353,199.553 h0.5
  text "1" at 212.353,199.553 h0.5
  text "1" at 177.506,197.905 h0.5
  text "1" at 177.506,197.905 h0.5